# EAGLE board PE10_version1 (EAGLE 9.6.2)
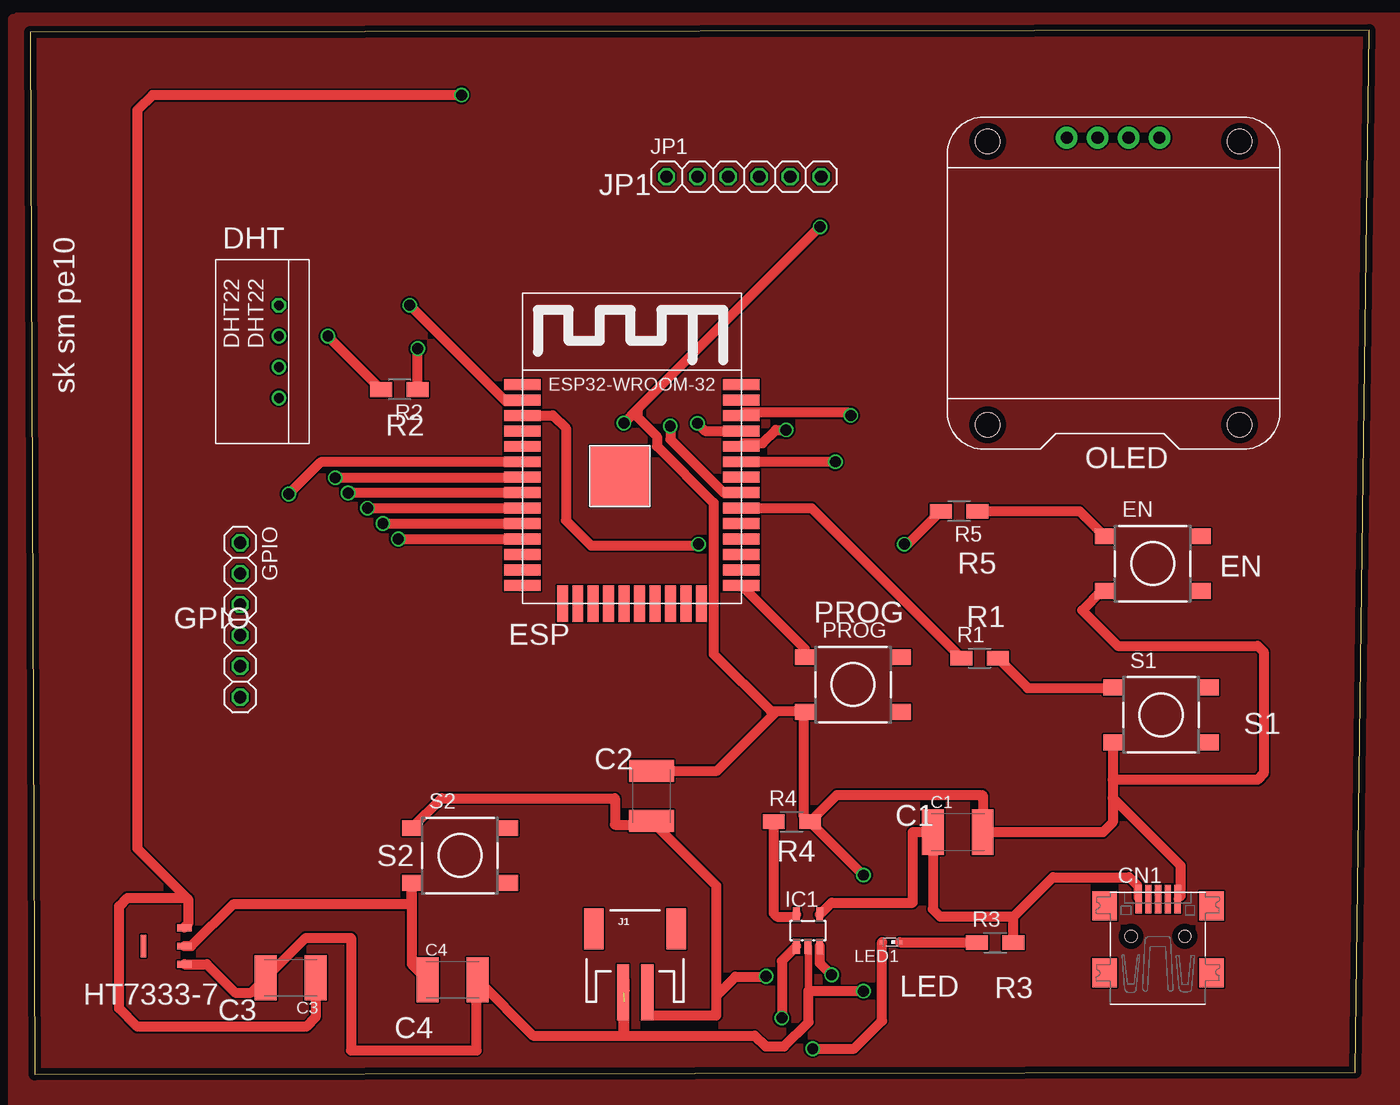
[diagram p0: board, top side]
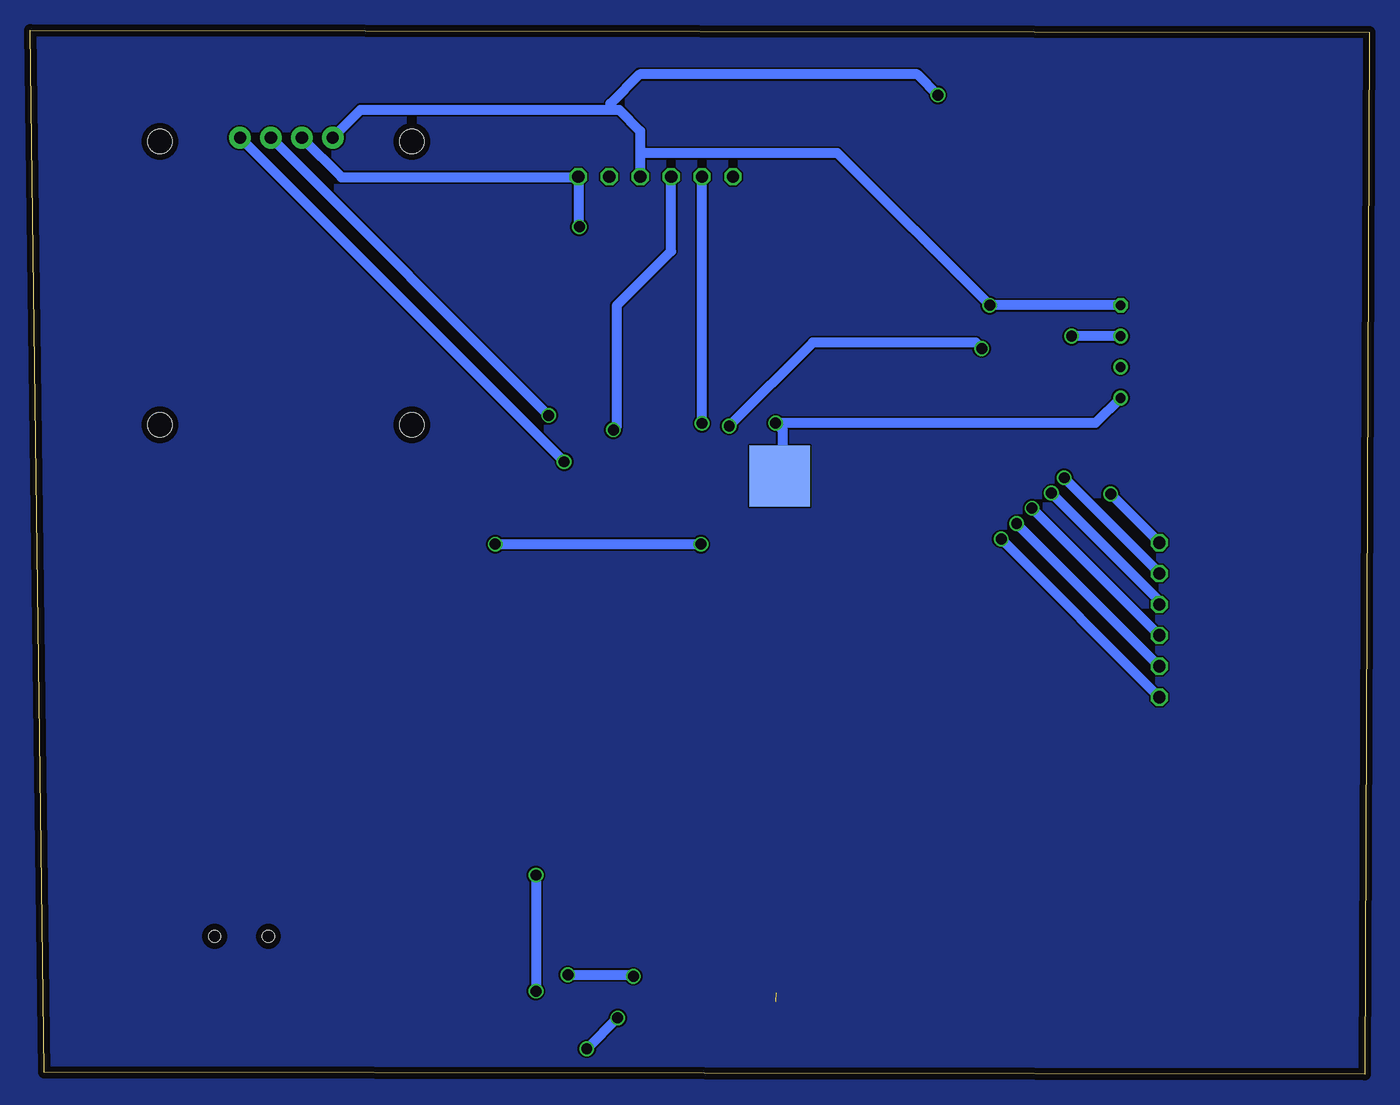
[diagram p1: board, bottom side, seen from below]

Size 109.99 x 85.79 mm. Coordinates in mm from the lower left corner, seen from the top.
Outline: 0.37,0 108.86,0.17 109.99,85.79 0,85.62 0.37,0
Copper layers (1*16): Top 0.035mm / dielectric 1.5mm / Bottom 0.035mm
Design rules "Aetzwerk-DRC 2 Lagen 35µm Cu": minimum track width 6mil, minimum drill 12mil, track to track 6mil, track to pad 6mil, pad to pad 6mil, via to via 6mil, smd to smd 6mil, copper to edge 20mil, drill to drill 8mil, minimum pad ring 8mil, minimum via ring 6mil, stop-mask expansion 3mil, vias tented up to drill 0mil, thermal gap 8mil

## Footprints (pad centres in the part's own frame; a part is rotated, then mirrored left to right if it is on the bottom)
C1812K = smd 1.8 x 3.7: 1 -2.05,0; 2 2.05,0
USB-MINIB = smd 0.5 x 2.308: D+ 0,4.064; D- -0.8,4.064; GND 1.6,4.064; ID 0.8,4.064; VBUS -1.6,4.064 | smd 2 x 2.4: GND1 -4.4,-2; GND2 -4.4,3.5; GND3 4.4,3.5; GND4 4.4,-2 | hole 1: -2.2,1; 2.2,1
RHT03_DHT-22 = drill 0.8: DATA -1.27,0; GND 3.81,0; NULL 1.27,0 | drill 0.8 octagon: VDD -3.81,0
DTSM-6 = smd 1.55 x 1.3: 1 -3.975,2.25; 2 3.975,2.25; 3 -3.975,-2.25; 4 3.975,-2.25
1X06 = drill 1.016 octagon: 1 -6.35,0; 2 -3.81,0; 3 -1.27,0; 4 1.27,0; 5 3.81,0; 6 6.35,0
SOT89 = smd 0.559 x 1.194: GND -1.499,-0.597; VIN 0,-0.597; VOUT 1.499,-0.597 | smd 1.829 x 0.457: P$4 0,2.743
SOT23-5L = smd 0.55 x 1.2: 1 -0.95,-1.3; 2 0,-1.3; 3 0.95,-1.3; 4 0.95,1.3; 5 -0.95,1.3
JST-2-SMD = smd 1 x 4.6: 1 -1,-3.7; 2 1,-3.7 | smd 1.6 x 3.4: NC1 -3.4,1.5; NC2 3.4,1.5
SMART-LED = smd 0.35 x 0.35: A 0,0.725; B 0,-0.725
OLED_0.96_I2C = drill 1 pad 1.778: GND -1.63,11.63; SCL 0.91,11.63; SDA 3.45,11.63; VCC -4.17,11.63 | hole 2: -10.67,-11.97; 10.03,-11.97; 10.03,11.33; -10.67,11.33
R1206W = smd 1.8 x 1.2: 1 -1.499,0; 2 1.499,0
ESP32-WROOM = smd 3 x 0.9: 3V3 0,16.74; EN 0,15.47; GND1 0,18.01; GND3 18,18.01; IO0 18,1.5; IO4 18,2.77; IO5 18,6.58; IO12 0,1.5; IO14 0,2.77; IO16 18,4.04; IO17 18,5.31; IO18 18,7.85; IO19 18,9.12; IO21 18,11.66; IO22 18,15.47; IO23 18,16.74; IO25 0,6.58; IO26 0,5.31; IO27 0,4.04; IO32 0,9.12; IO33 0,7.85; IO34 0,11.66; IO35 0,10.39; NC 18,10.39; RX 18,12.93; SENSOR_VN 0,12.93; SENSOR_VP 0,14.2; TX 18,14.2 | smd 0.9 x 3: CLK 9.635,0; CMD 8.365,0; GND2 3.285,0; IO2 14.715,0; IO13 4.555,0; IO15 13.445,0; SD0 10.905,0; SD1 12.175,0; SD2 5.825,0; SD3 7.095,0 | smd 5 x 5: GND4 8,10.5 | smd 5 x 5 bottom: GND5 8,10.5

## Placement (x,y rotation side)
C1  4.7UF  [C1812K]  76.19,19.91 0 top
C2  4.7uF  [C1812K]  51.02,22.9 90 top
C3  10uF  [C1812K]  21.38,7.93 180 top
C4  10uF  [C1812K]  34.67,7.77 0 top
CN1  CN1  [USB-MINIB]  92.65,10.35 0 top
DHT22  DHT22  [RHT03_DHT-22]  20.41,59.4 270 top
EN  DTSM-6  [DTSM-6]  92.22,41.98 0 top
GPIO  [1X06]  17.23,37.35 270 top
HT7333-7  HT7333  [SOT89]  12.04,10.55 90 top
IC1  MCP73831/OT  [SOT23-5L]  63.89,11.83 0 top
J1  5V  [JST-2-SMD]  49.68,10.46 0 top
JP1  JP1  [1X06]  58.62,73.77 0 top
LED1  RED  [SMART-LED]  70.7,10.86 90 top
OLED0.96  OLED_0.96_I2C  [OLED_0.96_I2C]  89.32,65.34 0 top
PROG  DTSM-6  [DTSM-6]  67.58,32.04 0 top
R1  10k  [R1206W]  78.01,34.2 0 top
R2  10k  [R1206W]  30.32,56.28 180 top
R3  470  [R1206W]  79.27,10.82 0 top
R4  2K  [R1206W]  62.57,20.76 0 top
R5  10k  [R1206W]  76.3,46.28 180 top
S1  DTSM-6  [DTSM-6]  92.91,29.54 0 top
S2  DTSM-6  [DTSM-6]  35.3,17.99 0 top
U$1  ESP32-WROOM  [ESP32-WROOM]  40.42,38.68 0 top

## Library data of the parts
C1-C4 = rcl; SPICEPREFIX: C
CN1 GPIO IC1 JP1 LED1 = adafruit
DHT22 = RHT03_DHT-22_AM2302; PROD_ID: SEN-10167
EN PROG S1 S2 = switch-tact
HT7333-7 = HT7333_SOT89
J1 = SparkFun-Connectors; PROD_ID: CONN-11443; SF_ID: PRT-08612
OLED0.96 = tft_1_8_1_44_oled_0_96
R1-R5 = rcl; SPICEPREFIX: R
U$1 = ESP32

## Nets
0: C1.2 C2.2 C3.2 C4.2 CN1.GND DHT22.GND EN.3 HT7333-7.GND IC1.2 J1.1 JP1.6 OLED0.96.GND PROG.3 R4.2 S1.3 U$1.GND5
3V3: C3.1 DHT22.VDD HT7333-7.VOUT JP1.4 OLED0.96.VCC U$1.3V3
18: R1.1 U$1.IO18
19: R2.1 U$1.IO19
GPIO1: GPIO.1 U$1.IO34
GPIO2: GPIO.2 U$1.IO35
GPIO3: GPIO.3 U$1.IO32
GPIO4: GPIO.4 U$1.IO33
GPIO5: GPIO.5 U$1.IO25
GPIO6: GPIO.6 U$1.IO26
N$1: OLED0.96.SCL U$1.IO22
N$2: OLED0.96.SDA U$1.IO21
N$3: DHT22.DATA R2.2
N$4: R1.2 S1.1
N$5: C1.1 CN1.VBUS IC1.4 R3.2
N$6: C4.1 HT7333-7.VIN S2.3
N$7: IC1.1 LED1.A
N$8: C2.1 IC1.3 J1.2 S2.1
N$9: LED1.B R3.1
N$10: EN.1 R5.1
N$12: IC1.5 R4.1
N$13: R5.2 U$1.EN
PROG: PROG.1 U$1.IO0
RX: JP1.2 U$1.TX
TX: JP1.3 U$1.RX

## Tracks (layer width: path | path; a pad name or v marks a point on that pad's centre or on a via)
0  (via drill 0.9)  (1 unrouted)
  Top 0.61: IC1.2 63.92,10.5 63.92,6.85 | 94.49,14.65 CN1.GND
  Top 0.813: v48.76,53.53 49.89,54.66 | 49.89,54.66 v64.88,69.65 | 19.15,8.11 C3.2 | R4.2 66.26,22.95 78.2,22.95 78.24,22.91 C1.2 88.12,19.91 88.93,20.72 88.93,22.72 | R4.2 v68.45,16.38 | v68.45,6.85 63.92,6.85 63.95,6.82 63.95,4.3 61.94,2.29 60.4,2.29 59.51,3.18 48.65,3.18 | 88.93,24.22 S1.3 88.82,27.19 | 88.93,24.22 88.93,22.72 | EN.3 88.01,39.73 86.42,38.14 89.33,35.22 100.83,35.22 101.33,34.72 101.33,24.72 100.83,24.22 88.93,24.22 | R4.2 63.51,21.32 63.51,29.69 PROG.3 63.54,29.86 61.33,29.86 | 48.77,5.98 48.77,5.62 | 61.33,29.86 60.83,29.86 56.14,34.54 56.14,46.97 51.48,51.63 51.48,52.42 49.89,54 49.89,54.66 | 48.65,3.18 41.31,3.18 C4.2 36.49,7.53 36.68,7.35 36.68,1.98 26.33,1.98 26.33,11.22 22.63,11.22 C3.2 | J1.1 48.72,6.72 | 48.68,3.21 48.65,3.18 | 88.93,22.72 94.49,17.16 94.49,14.65 | J1.1 48.68,7.57 48.83,7.72 48.83,6.92 | 48.83,6.92 J1.1 | J1.1 48.68,3.21 | 48.68,3.21 48.83,3.36 48.83,6.92 | HT7333-7.GND 14.5,9.05 16.83,6.72 18.13,6.72 C3.2 | 61.33,29.86 56.43,24.95 C2.2
  Bottom 0.813: OLED0.96.GND 84.44,73.72 65,73.72 JP1.6 | JP1.6 | JP1.6 64.96,69.73 v64.88,69.65 | v68.45,16.38 v68.45,6.85 | 48.42,47.26 U$1.GND5 48.19,49.42 48.19,52.95 v48.76,53.53 22.47,53.53 DHT22.GND
3V3  (via drill 0.9)
  Top 0.813: U$1.3V3 40.3,55.31 39.07,55.31 v31.17,63.21 | v35.43,80.48 | v35.43,80.48 10.04,80.48 8.79,79.24 8.79,21.54 8.79,18.56 12.85,14.5 | HT7333-7.VOUT 12.94,12.35 12.94,14.41 12.85,14.5 | C3.1 23.43,4.69 22.68,3.93 8.78,3.93 7.28,5.42 7.28,13.82 7.97,14.5 12.85,14.5
  Bottom 0.813: OLED0.96.VCC 82.86,79.26 62.33,79.26 | 62.33,79.26 61.63,79.26 59.89,77.52 59.89,75.72 | 59.89,75.72 JP1.4 | DHT22.VDD v31.17,63.21 43.69,75.72 59.89,75.72 | v35.43,80.48 37.13,82.18 59.93,82.18 62.33,79.77 62.33,79.26
18
  Top 0.813: U$1.IO18 64.18,46.53 R1.1
19  (via drill 0.9)
  Top 0.813: R2.1 v31.82,59.65 | U$1.IO19 58.4,47.82 56.93,47.82 52.57,52.18 v52.57,53.28
  Bottom 0.813: v31.82,59.65 32.32,60.15 45.71,60.15 v52.57,53.28
GND
  pour Top: -1.01,86.89 112.54,86.89 112.54,-3.91 -1.43,-3.91 -1.43,86.74 -1.34,86.74
  pour Bottom: -3.44,87.99 -3.44,-6.82 116.33,-6.82 116.33,87.99
GPIO1  (via drill 0.9)
  Top 0.813: U$1.IO34 40.39,50.32 23.85,50.32 v21.23,47.7
  Bottom 0.813: GPIO.1 v21.23,47.7
GPIO2  (via drill 0.9)
  Top 0.813: v25.05,49.03 40.37,49.03 U$1.IO35
  Bottom 0.813: v25.05,49.03 17.23,41.21 GPIO.2
GPIO3  (via drill 0.9)
  Top 0.813: U$1.IO32 40.39,47.78 v26.1,47.78
  Bottom 0.813: v26.1,47.78 17.23,38.91 GPIO.3
GPIO4  (via drill 0.9)
  Top 0.813: v27.69,46.53 U$1.IO33
  Bottom 0.813: GPIO.4 v27.69,46.53
GPIO5  (via drill 0.9)
  Top 0.813: v28.96,45.26 U$1.IO25
  Bottom 0.813: GPIO.5 v28.96,45.26
GPIO6  (via drill 0.9)
  Top 0.813: v30.23,43.99 U$1.IO26
  Bottom 0.813: GPIO.6 v30.23,43.99
N$1  (via drill 0.9)
  Top 0.813: U$1.IO22 58.67,54.4 67.16,54.4 v67.41,54.15
  Bottom 0.813: v67.41,54.15 OLED0.96.SCL
N$2  (via drill 0.9)
  Top 0.813: U$1.IO21 v66.14,50.34
  Bottom 0.813: v66.14,50.34 OLED0.96.SDA
N$3  (via drill 0.9)
  Top 0.813: v24.44,60.67 R2.2
  Bottom 0.813: DHT22.DATA v24.44,60.67
N$4
  Top 0.813: R1.2 81.92,31.79 81.92,31.76 88.9,31.76 S1.1
N$5
  Top 0.61: 90.94,15.55 90.94,14.52 CN1.VBUS
  Top 0.813: 80.77,12.97 80.76,12.98 74.74,12.98 74.14,13.57 C1.1 74.13,19.92 72.51,19.92 72.51,14.14 72.49,14.11 65.83,14.11 IC1.4 | R3.2 80.77,12.97 | 90.94,15.55 90.28,16.21 84.02,16.21 80.77,12.97
N$6
  Top 0.813: HT7333-7.VIN 13.23,10.55 16.65,13.97 31.33,13.97 S2.3 31.33,9.07 C4.1
N$7  (via drill 0.9)
  Top 0.813: v61.74,4.64 61.74,9.33 IC1.1 | v64.28,2.11 67.68,2.11 69.97,4.4 LED1.A
  Bottom 0.813: v61.74,4.64 v64.28,2.11
N$8  (via drill 0.9)
  Top 0.813: J1.2 50.68,4.85 56.37,4.85 56.37,6.47 | S2.1 33.79,22.7 48.03,22.7 48.03,20.51 49.99,20.51 50.1,20.63 50.8,20.63 C2.1 56.37,15.5 56.37,6.47 | v60.45,8.06 60.42,8.03 57.93,8.03 56.37,6.47 | IC1.3 64.84,9.17 v65.83,8.18
  Bottom 0.813: v65.83,8.18 60.57,8.18 v60.45,8.06
N$9
  Top 0.813: R3.1 77.73,10.86 LED1.B
N$10
  Top 0.813: R5.1 86.19,46.28 EN.1
N$12
  Top 0.813: R4.1 61.07,13.24 61.35,12.96 62.77,12.96 IC1.5
N$13  (via drill 0.9)
  Top 0.813: U$1.EN 42.94,54.15 44,53.1 44,45.52 46.08,43.44 54.77,43.44 v54.9,43.57 | R5.2 72.09,43.57 v71.8,43.57
  Bottom 0.813: v71.8,43.57 v54.9,43.57
PROG
  Top 0.813: U$1.IO0 63.61,35 PROG.1
RX  (via drill 0.9)
  Top 0.813: v54.81,53.5 55.43,52.88 U$1.TX
  Bottom 0.813: v54.81,53.5 JP1.2
TX  (via drill 0.9)
  Top 0.813: U$1.RX 58.68,51.88 60.15,51.88 61.24,52.97 v62.09,52.97
  Bottom 0.813: v62.09,52.97 61.81,53.25 61.81,63.17 57.35,67.64 JP1.3

## Text on the board
tNames: JP1 | DHT | sk sm pe10 | R2 | OLED | R5 | EN | GPIO | PROG | R1 | ESP | S1 | C2 | C1 | R4 | S2 | LED | R3 | HT7333-7 | C3 | C4